# Altium PCB Panelized_S3220B.PcbDoc
Units mm, origin at the board's own origin, x right, y up, seen from the top; angles counter-clockwise.
Board outline 319 x 339 mm, 4 copper layers (Top Layer, Internal 1, Internal 2, Bottom Layer), stack 1.411 mm thick; 3 components, 135 nets, 10 pads, 0 vias.
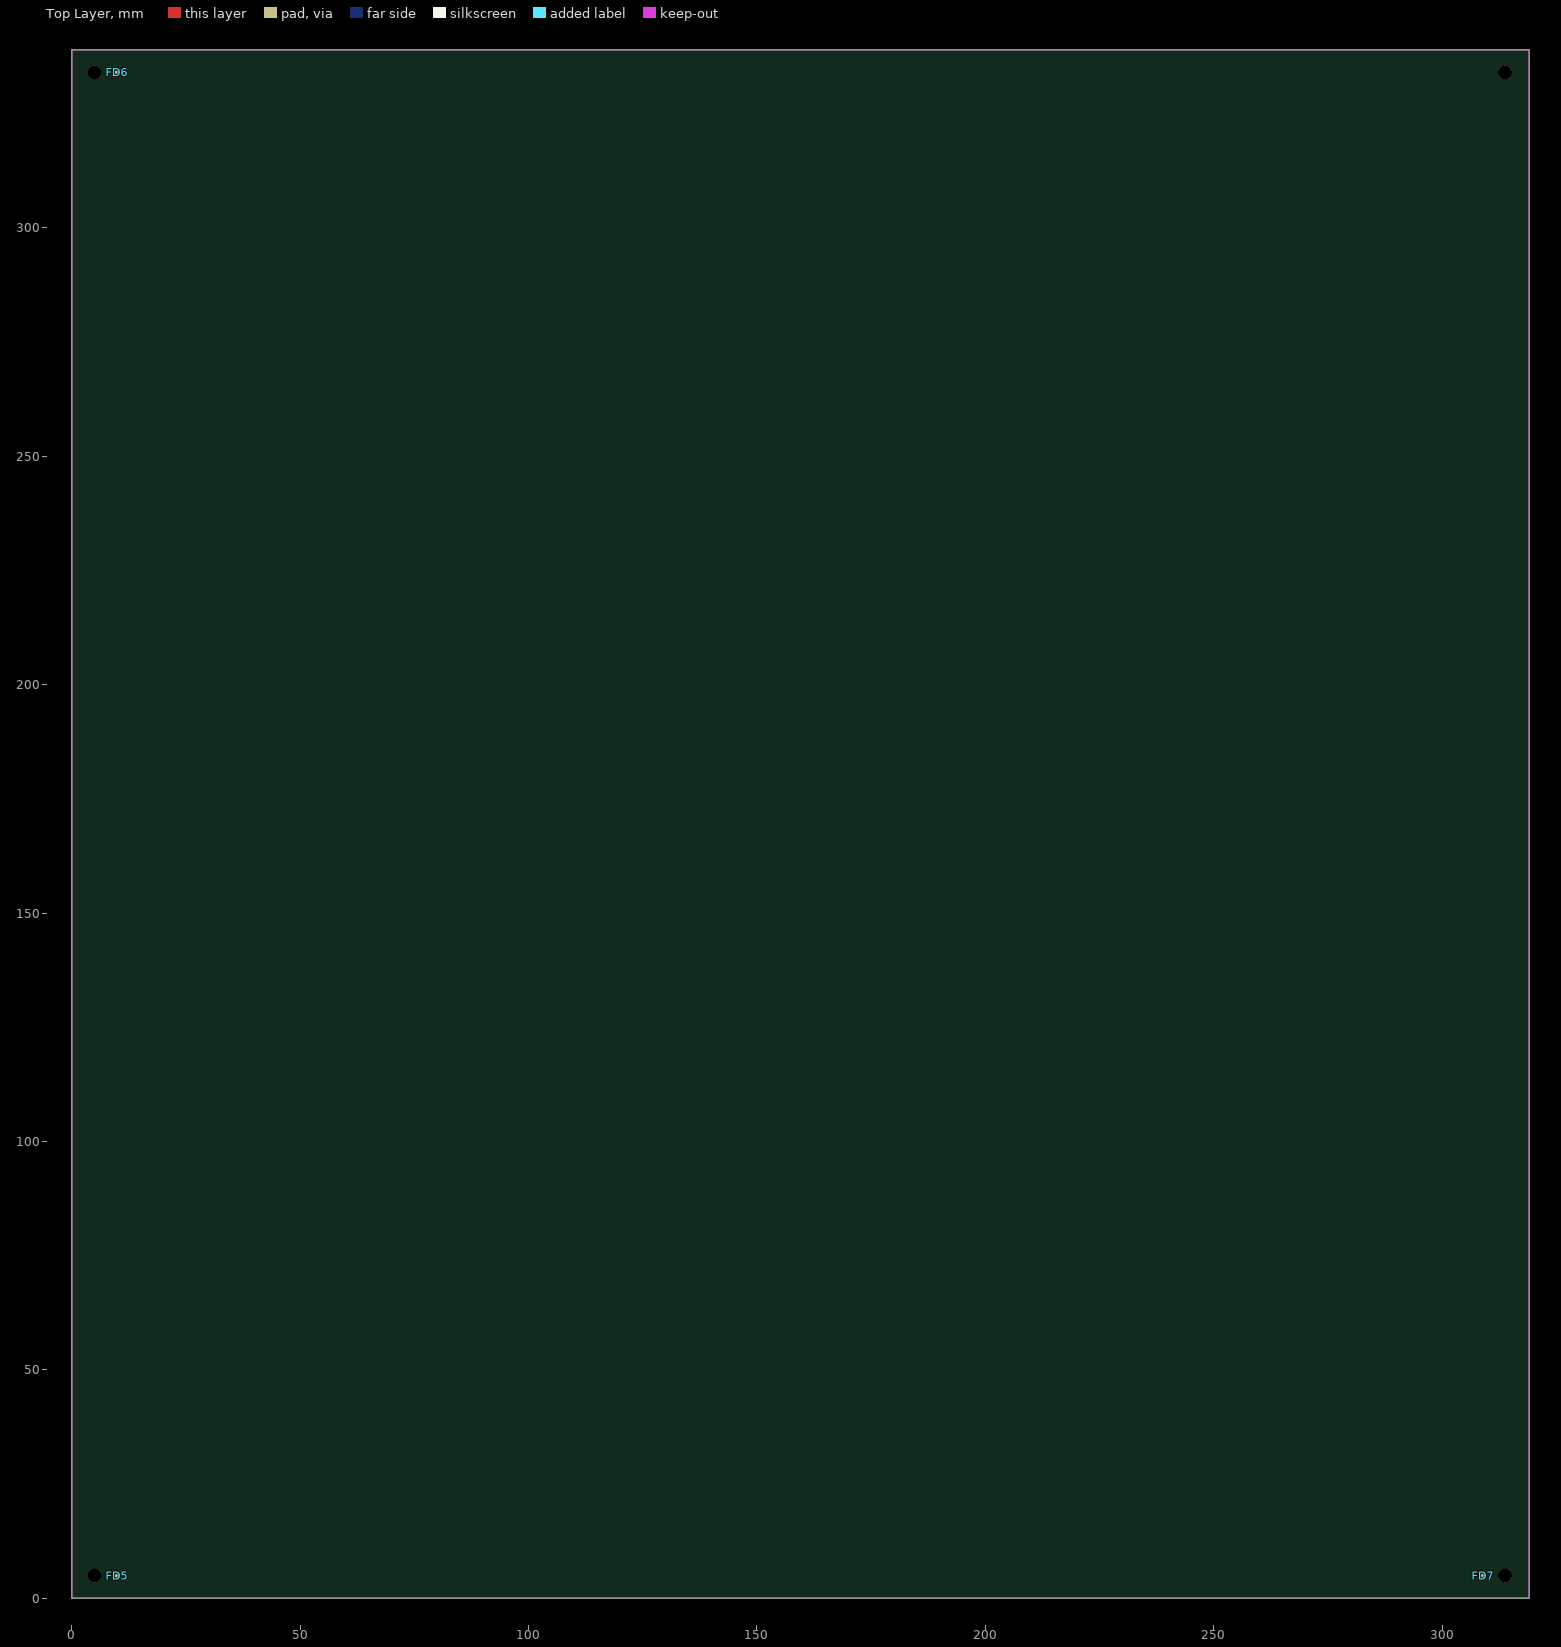
[diagram p0: Top Layer view]
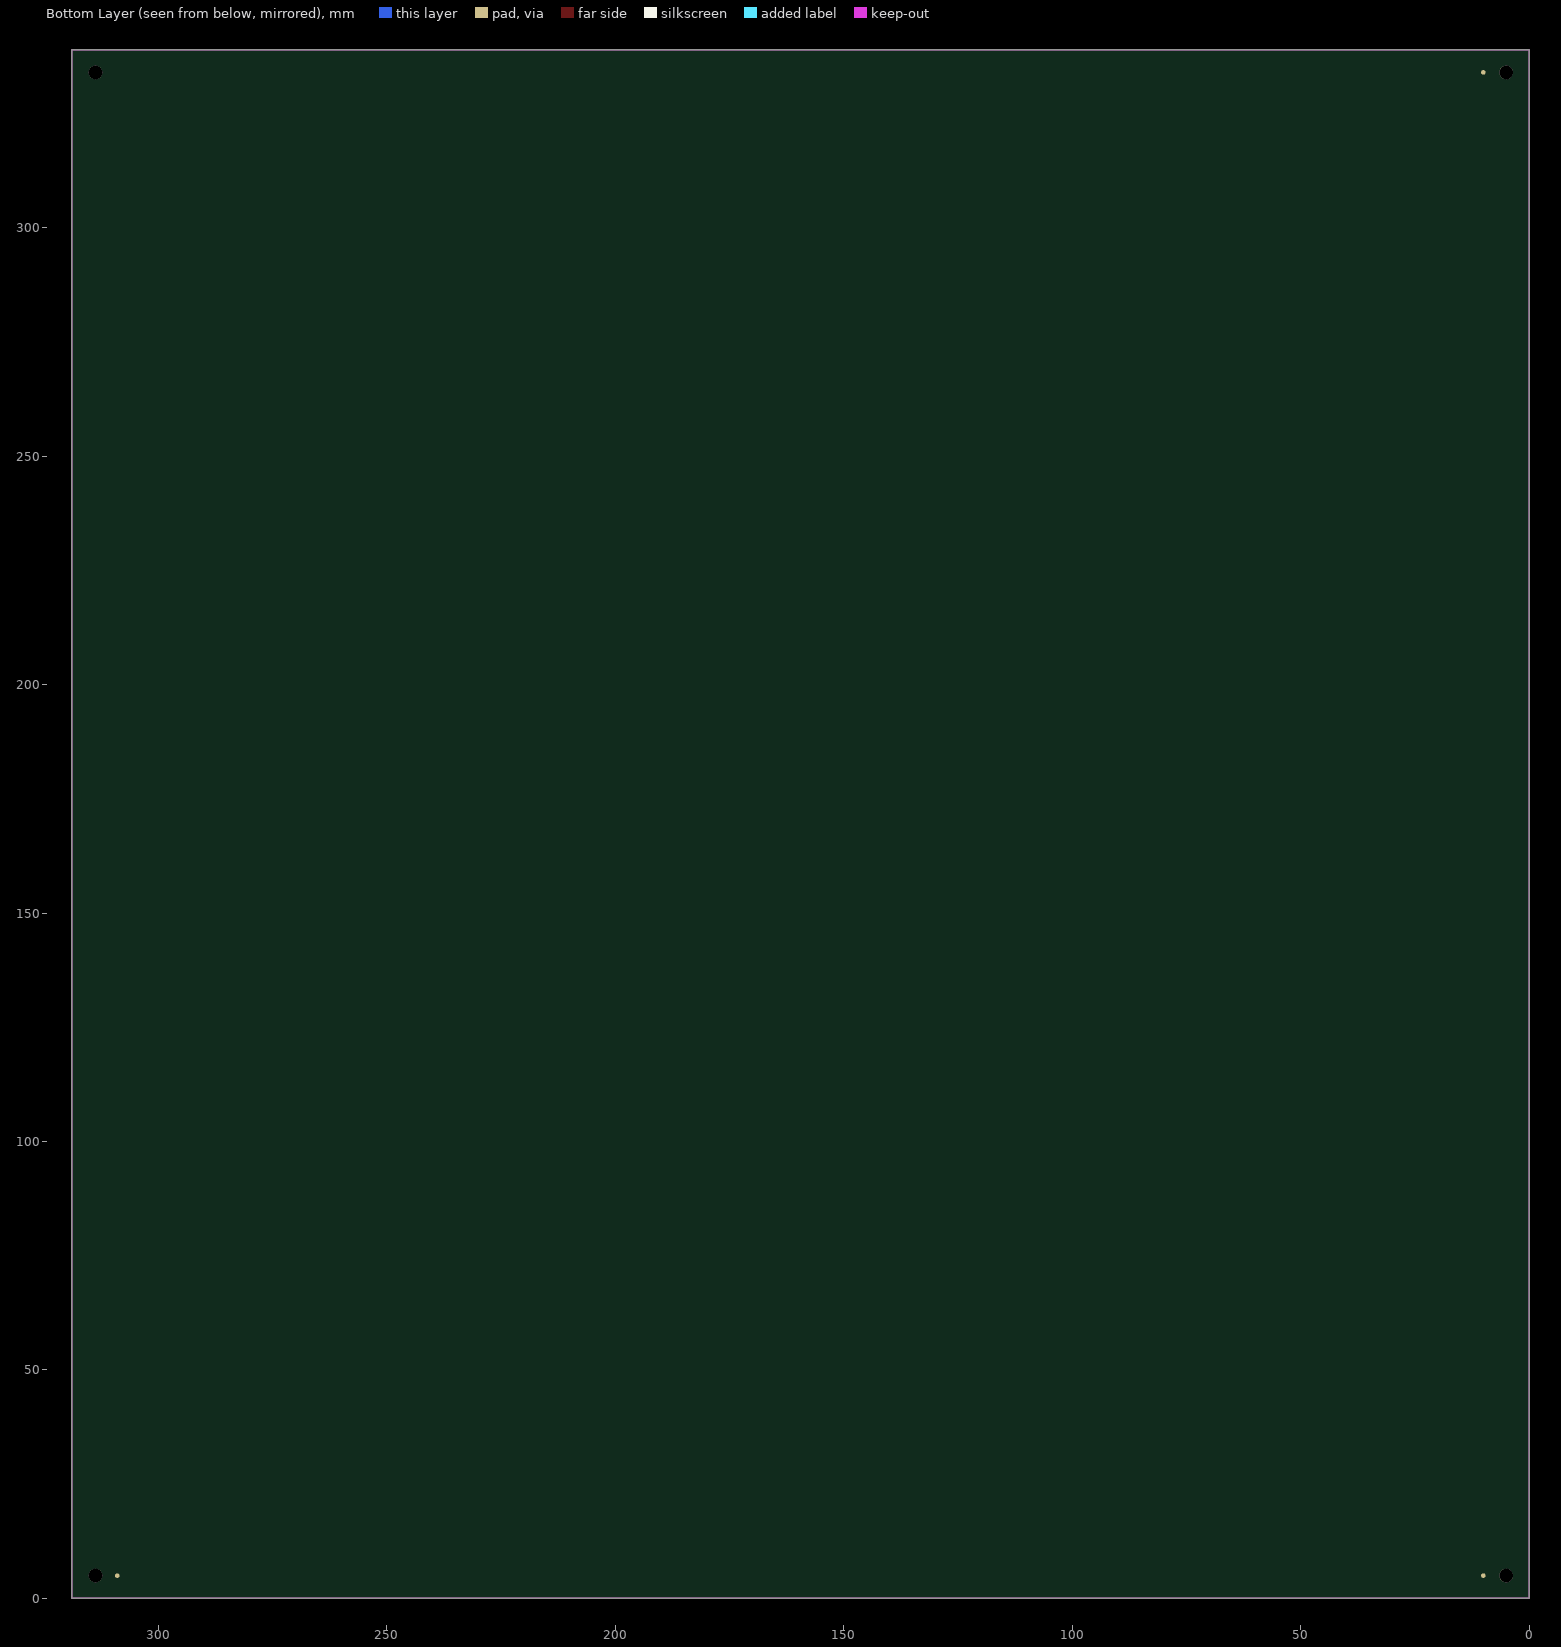
[diagram p1: Bottom Layer view, seen from below]

## Layer stack, top to bottom
Top Solder: solder mask 0.0102, Solder Resist, Dk 3.5
Top Layer: signal copper 0.035
Dielectric 1: core 0.12, FR-4, Dk 4.2
Internal 1: signal copper 0.035
Dielectric 3: prepreg 1.03, Dk 4.2
Internal 2: signal copper 0.035
Dielectric 2: core 0.12, Dk 4.2
Bottom Layer: signal copper 0.0356
Bottom Solder: solder mask 0.0102, Solder Resist, Dk 3.5

## Board outline
0,0 0,339 319,339 319,0

## Design rules (kind name [scope] priority, off if disabled: settings)
AssemblyTestPointUsage [All] p1 off:
AssemblyTestpoint [All] p1 off: testpointundercomponent=TRUE minsize=1.016 maxsize=2.54 preferedsize=1.524 minholesize=0 maxholesize=1.016 preferedholesize=0.813 testpointgrid=0.025 usegrid=TRUE gridtolerance=0 allowsidetop=TRUE allowsidebottom=TRUE
Clearance Clearance_TMP103 [HasFootprint('BGA4C40P2X2_76X76X62')] p1: gap=0.102 ignorepadtopadclearanceinfootprint=FALSE except(0: Arc-Hole Track-Hole SMDPad-Hole THPad-Hole Via-Hole Fill-Hole Poly-Hole Region-Hole Text-Hole)
Clearance Clearance_Poly [InPoly] p2: gap=0.25 ignorepadtopadclearanceinfootprint=FALSE except(0: Arc-Hole Track-Hole SMDPad-Hole THPad-Hole Via-Hole Fill-Hole Poly-Hole Region-Hole Text-Hole)
Clearance [All] p3: gap=0.15 ignorepadtopadclearanceinfootprint=FALSE except(0: Arc-Hole Track-Hole SMDPad-Hole THPad-Hole Via-Hole Fill-Hole Poly-Hole Region-Hole Text-Hole)
Clearance Clearance_Keepout [isKeepout] p4: gap=0.3 ignorepadtopadclearanceinfootprint=FALSE except(0: Arc-Hole Track-Hole SMDPad-Hole THPad-Hole Via-Hole Fill-Hole Poly-Hole Region-Hole Text-Hole)
ComponentClearance ComponentClearance_Fiducial [hasfootprint('fiducial_rect') or hasfootprint('fiducial_round')] p1 off: gap=0 collisioncheckmode=3 verticalgap=0 showdistances=FALSE
ComponentClearance [All] p2 off: gap=0.254 collisioncheckmode=3 verticalgap=0.254 showdistances=FALSE
DiffPairsRouting [All] p1: maxlimit=0.25 minlimit=0.25 mostfreqgap=0.25 toplayer_minwidth=0.2 toplayer_maxwidth=0.3 toplayer_prefwidth=0.2 midlayer1_minwidth=0.2 midlayer1_maxwidth=0.3 midlayer1_prefwidth=0.2 midlayer2_minwidth=0.2 midlayer2_maxwidth=0.3 midlayer2_prefwidth=0.2 bottomlayer_minwidth=0.2 bottomlayer_maxwidth=0.3 bottomlayer_prefwidth=0.2 maxuncoupledlength=12.7
FabricationTestPointUsage [All] p1 off: valid=0 allowmultiple=FALSE
FabricationTestpoint [All] p1 off: side=3 testpointundercomponent=TRUE minsize=1.016 maxsize=2.54 preferedsize=1.524 minholesize=0 maxholesize=1.016 preferedholesize=0.813 testpointgrid=0.025 allowsidetop=TRUE allowsidebottom=TRUE usegrid=TRUE gridtolerance=0
FanoutControl Fanout_BGA [IsBGA] p1: bgadir=Out bgaviamode=Centered fanoutstyle=BGA fanoutdirection=Alternating viagrid=0.025 // Fanout_BGA (Default Rule)
HoleSize [All] p1: absolutevalues=TRUE maxlimit=5.08 minlimit=0.203 maxpercent=80.000 minpercent=20.000
MatchedLengths "USB length matching" [InNetClass('All Nets')] p1: tolerance=2 checknetsindiffpair=TRUE checkdiffpairvsdiffpair=FALSE checkxsignals=FALSE checkothers=FALSE
MinimumSolderMaskSliver [All] p1: minsoldermaskwidth=0
PlaneClearance [All] p1: clearance=0.305
PlaneConnect PlaneConnect_Via [isvia] p1: planeconnectstyle=Direct reliefexpansion=0.508 reliefentries=4 reliefconductorwidth=0.254 reliefairgap=0.254
PlaneConnect [All] p2: planeconnectstyle=Relief reliefexpansion=0.254 reliefentries=4 reliefconductorwidth=0.508 reliefairgap=0.254
PolygonConnect PolygonConnect_SR [(ObjectKind = 'Component') And (Footprint = 'BGA81C80P3X3_290X230X110')] p1: connectstyle=Relief reliefconductorwidth=0.2 reliefentries=4 polygonreliefangle="90 Angle" airgapwidth=0.254
PolygonConnect PolygonConnect_TMP103 [HasFootprint('BGA4C40P2X2_76X76X62')] p2: connectstyle=Relief reliefconductorwidth=0.152 reliefentries=4 polygonreliefangle="90 Angle" airgapwidth=0.305
PolygonConnect PolygonConnect_Via [IsVia] p3: connectstyle=Direct reliefconductorwidth=0.254 reliefentries=4 polygonreliefangle="90 Angle" airgapwidth=0.254
PolygonConnect [All] p4: connectstyle=Relief reliefconductorwidth=0.2 reliefentries=4 polygonreliefangle="90 Angle" airgapwidth=0.305
RoutingLayers [All] p1: top layer_v5=TRUE mid layer 1_v5=FALSE mid layer 2_v5=FALSE bottom layer_v5=TRUE
RoutingVias [All] p1: holewidth=0.35 width=0.5 viastyle="Through Hole" minholewidth=0.25 minwidth=0.5 maxholewidth=0.5 maxwidth=1
SMDNeckDown [All] p1 off: percent=50.000
ShortCircuit ShortCircuit_Logo [hasfootprint('GT Logo Inv') or istextinverted] p1: allowed=TRUE
ShortCircuit [All] p2: allowed=FALSE
SilkToSilkClearance [All] p1 off: silktosilkclearance=0.254
SilkToSolderMaskClearance SilkscreenOverComponentPads [IsPad] p1 off: minsilkscreentomaskgap=0.254 clearancetoexposedcopper=TRUE
SolderMaskExpansion [All] p1 off: expansion=0.102 istentingtop=FALSE
Width Width_CASE [InNet('CASE')] p1: maxlimit=2.54 minlimit=0.203 preferedwidth=0.508
Width [All] p2: maxlimit=2.5 minlimit=0.15 preferedwidth=0.2
15 further rules are at their usual default settings.

## Classes and differential pairs
differential pair USB_Data: +USB_Data_P -USB_Data_N

## Components (designator, comment, footprint, x,y, rotation, side; value= is the part's Value field where it differs from the comment)
FD5 "Fiducial" FD_Fiducial 10,5 r90 top (schematic designator FD3)
FD6 "Fiducial" FD_Fiducial 10,334 r90 top (schematic designator FD3)
FD7 "Fiducial" FD_Fiducial 309,5 r90 top (schematic designator FD3)

## Footprints (in the part's own frame and the unit in brackets; to place one, negate y for a bottom-side part, rotate by r counter-clockwise, add the part's x,y. Pads: shape width x height; smd on the part's side, far side on the other; paste and mask are expansions set on the pad)
FD_Fiducial [mm] "Fiducial - reference point"
  round 1 smd paste-10 mask+0.5: 0(0,0)
  round 1 smd far side paste-10 mask+0.5: 0(0,0)
  Top Layer pour cut-out: 0,-1 -0.383,-0.924 -0.707,-0.707 -0.924,-0.383 -1,0 -1,0 -0.924,0.383 -0.707,0.707 -0.383,0.924 0,1 0,1 0.383,0.924 0.707,0.707 0.924,0.383 1,0 1,0 0.924,-0.383 0.707,-0.707 0.383,-0.924 0,-1
  Bottom Layer pour cut-out: 0,-1 -0.383,-0.924 -0.707,-0.707 -0.924,-0.383 -1,0 -1,0 -0.924,0.383 -0.707,0.707 -0.383,0.924 0,1 0,1 0.383,0.924 0.707,0.707 0.924,0.383 1,0 1,0 0.924,-0.383 0.707,-0.707 0.383,-0.924 0,-1

## Part data
FD5 FD6 FD7: "Reference point for assembly machine", Manufacturer="Swiss Innovation Lab", Currency=$, Manufacturer Part Number=Fiducial, Price=0, Supplier 1="Swiss Innovation Lab", Supplier Part Number 1=Fiducial

## Free pads (board coordinates)
  round 3 hole 3 unplated: ""(5,5) ""(5,334) ""(313.75,334) ""(313.75,5)

## Nets (pads, with @x,y where several pads share a name; then routed paths per layer and width w, separated by ;. In a path a pad name is that pad's centre, name@x,y a point inside that pad or via, vN(x,y) a via of type N, cw(c..) or ccw(c..) an arc to the next point about the centre after c; other vN are vias at no path point)
+3V: 
+3V_ext: 
+4V7: 
+5V: 
+VBat: 
ACC_INT: 
eLED_on_off: 
eLED_on_off_ext: 
ePaper_On_Off: 
ePaper_PSU: 
ePaper_RST: 
ePaper_VDD: 
ePaper_Wake_up: 
GND: 
GND_ext: 
GPS_On_Off: 
I2C_EXP_INT: 
LED_1: 
LED_1_switched: 
LED_2: 
LED_2_switched: 
LED_3: 
LED_3_switched: 
LED_4: 
LED_4_switched: 
LED_ACOK: 
LED_ACOK_ext: 
LED_CHGOK: 
LED_CHGOK_ext: 
Lora_On_Off: 
LORA_RESET: 
LoRa_VDD: 
Mic_ext: 
Mic_On_Off: 
Mic_On_Off_ext: 
Microphone: 
NetC5_1: 
NetC6_1: 
NetC6_2: 
NetC8_2: 
NetC11_1: 
NetC11_2: 
NetC12_2: 
NetC15_1: 
NetC17_2: 
NetC24_2: 
NetC28_2: 
NetC32_1: 
NetC33_1: 
NetC39_1: 
NetC40_1: 
NetC41_2: 
NetC42_2: 
NetC43_2: 
NetC44_1: 
NetC44_2: 
NetC45_2: 
NetD9_2: 
NetF2_1: 
NetJ10_1: 
NetJ10_2: 
NetJ10_3: 
NetJ14_1: 
NetL3_2: 
NetP7_S: 
NetQ2_3: 
NetQ3_3: 
NetQ5_3: 
NetQ6_3: 
NetQ10_3: 
NetR1_2: 
NetR2_2: 
NetR3_2: 
NetR6_2: 
NetR8_1: 
NetR9_1: 
NetR10_1: 
NetR10_2: 
NetR14_2: 
NetR15_1: 
NetR16_1: 
NetR18_1: 
NetR19_1: 
NetR19_2: 
NetR21_2: 
NetR38_2: 
NetR49_1: 
NetR49_2: 
NetU5_1: 
NetU7_13: 
NetU8_16: 
NetU19_1: 
NetU19_2: 
NetU19_3: 
NTC: 
PB_1: 
PB_1_ext: 
PB_2: 
PB_2_ext: 
PB_3: 
PB_3_ext: 
PB_4: 
PB_4_ext: 
RESET#: 
RX_ePaper: 
S\D\: 
SCL: 
SCL_ext: 
SDA: 
SDA_ext: 
SWDCLK: 
SWDIO: 
SWO: 
TX_ePaper: 
UART_CTS: 
UART_RTS: 
UART_RX_ePaper: 
UART_RX_GPS: 
UART_RX_Lora: 
UART_RX_USB: 
UART_RX_WiFi: 
UART_TX_ePaper: 
UART_TX_GPS: 
UART_TX_Lora: 
UART_TX_USB: 
UART_TX_WiFi: 
USB_Data_N: 
USB_Data_P: 
VBat: 
Vcc: 
Vcc_ext: 
Vext: 
VSys: 
Vusb: 
WiFi_ON_OFF: 
pads on no net: FD5.0 FD6.0 FD7.0

## Keep-outs
Keep-Out Layer:
  the board outline again, w0.3

## Silkscreen, mask and mechanical layers (free items; w line width, h text height)
Fabrication notes:
  drawing of 702 lines, arcs and shapes, not listed
  text "DESIGN INFORMATION" at 364.852,297.793 h2
  text "BOARD NAME:" at 402.444,297.793 h2
  text "Panelized S3220B" at 415.25,297.75 h2
  text "BOARD TECHNOLOGY" at 364.852,295.253 h2
  text "0.2mm" at 366.973,293.064 h2
  text "PANEL SIZE:" at 417.25,293 h2
  text "319.00 mm" at 431.75,293 h2
  text "339.00 mm" at 454.75,293 h2
  text "0.2mm" at 380.651,292.891 h2
  text "0.2mm" at 394.621,292.764 h2
  text "X" at 447.531,292.205 h2
  text "(MIN. TRACK   /      PADS          /    CLEARANCE)" at 364.75,290 h2
  text "SINGLE BOARD SIZE:" at 409.75,289 h2
  text "147.00 mm" at 431.75,289 h2
  text "62.50 mm" at 454.75,289 h2
  text "X" at 447.531,288.455 h2
  text "MINIMUM HOLE SIZE: 0.35mm" at 365,286.75 h2
  text "CIRCUIT TYPE:" at 364.852,282.731 h2
  text "SS" at 387.712,282.731 h2
  text "DS" at 405.492,282.731 h2
  text "X" at 420.097,282.731 h2
  text "PTH" at 423.272,282.731 h2
  text "ML" at 434.194,282.731 h2
  text "X" at 438.004,282.731 h2
  text "No. of Layers" at 441.052,282.731 h2
  text "4" at 458.413,282.574 h2
  text "FINGER CONNECTOR DIM PER:" at 364.852,279.683 h2
  text "AS SHOWN" at 441.052,279.683 h2
  text "No. OFF TOTAL" at 381.616,276.889 h2
  text "ONE SIDE" at 423.272,276.889 h2
  text "BOTH SIDES" at 441.052,276.635 h2
  text "X" at 402.414,274.068 h2
  text "VIAS:" at 364.852,273.968 h2
  text "NONE" at 376.282,273.968 h2
  text "X" at 384.664,273.968 h2
  text "FEED THRU'" at 387.712,273.968 h2
  text "TENTED" at 405.492,273.968 h2
  text "BURIED LAYER SEQUENCE" at 423.272,273.968 h2
  text "UNIQUE DRILL" at 387.712,270.92 h2
  text "2 SIZE" at 405.492,270.92 h2
  text "BLIND LAYER SEQUENCE" at 423.272,270.92 h2
  text "Layer Stack Manager (PCB)" at 400.285,268.634 h2
  text "X" at 438.004,268.634 h2
  text "AS SHOWN" at 441.052,268.634 h2
  text "LAYER CONSTRUCTION PER:" at 364.852,268.507 h2
  text "Altium Designer 21" at 440.891,265.847 h2
  text "ARTWORK:" at 364.852,265.713 h2
  text "MANUAL" at 387.712,265.713 h2
  text "DIGITISED" at 405.492,265.713 h2
  text "X" at 420.224,265.713 h2
  text "CAD" at 423.272,265.713 h2
  text "TYPE" at 434.194,265.713 h2
  text "ARTWORK/PATTERN MASTER LIST" at 364.852,261.014 h2
  text "DESCRIPTION" at 366.122,258.601 h2
  text "DRAWING No./CAD FILE REF." at 384.791,258.601 h2
  text "LAYER NAME" at 426.066,258.601 h2
  text "GERBER FILE REF" at 446.818,258.525 h2
  text "Top Paste Mask" at 424.009,253.521 h2
  text "GTP" at 416.932,253.471 h2
  text "GTP" at 466.812,253.445 h2
  text "GERBER FILE" at 364.507,253.394 h2
  text "GTO" at 416.932,250.971 h2
  text "GTO" at 466.812,250.956 h2
  text "Top Overlay" at 424.009,250.93 h2
  text "GERBER FILE" at 364.507,250.854 h2
  text "GTS" at 416.932,248.471 h2
  text "Top Solder Mask" at 424.009,248.492 h2
  text "GTS" at 466.812,248.365 h2
  text "GERBER FILE" at 364.507,248.314 h2
  text "TOP LAYER" at 424.009,245.901 h2
  text "GTL" at 466.812,245.825 h2
  text "GERBER FILE" at 364.507,245.774 h2
  text "GTL" at 416.932,245.771 h2
  text "G1" at 466.812,243.442 h2
  text "Signal Layer 1" at 424.009,243.342 h2
  text "G1" at 416.932,243.251 h2
  text "GERBER FILE" at 364.507,243.234 h2
  text "Signal Layer 2" at 424.01,240.842 h2
  text "G2" at 466.812,240.842 h2
  text "G2" at 416.932,240.751 h2
  text "GERBER FILE" at 364.507,240.694 h2
  text "BOTTOM LAYER" at 424.009,238.281 h2
  text "GBL" at 416.932,238.207 h2
  text "GBL" at 466.812,238.205 h2
  text "GERBER FILE" at 364.507,238.154 h2
  text "GBS" at 416.932,235.807 h2
  text "Bottom Solder Mask" at 424.009,235.792 h2
  text "GBS" at 466.812,235.665 h2
  text "GERBER FILE" at 364.507,235.614 h2
  text "GBO" at 416.932,233.207 h2
  text "Bottom Overlay" at 424.009,233.201 h2
  text "GBO" at 466.812,233.125 h2
  text "GERBER FILE" at 364.507,233.074 h2
  text "GBP" at 466.812,230.712 h2
  text "Bottom Paste Mask" at 424.009,230.661 h2
  text "GBP" at 416.932,230.611 h2
  text "GERBER FILE" at 364.507,230.534 h2
  text "GM3" at 466.812,225.612 h2
  text "V-groove scoring" at 424.009,225.561 h2
  text "GM3" at 416.932,225.511 h2
  text "GERBER FILE" at 364.507,225.434 h2
  text "GM4" at 466.812,223.112 h2
  text "Route Cutter Tool Layer" at 424.009,223.061 h2
  text "GM4" at 416.932,223.011 h2
  text "GERBER FILE" at 364.507,222.934 h2
  text "APERTURE LIST" at 364.507,210.347 h2
  text "APR" at 416.932,210.271 h2
  text "DRILL REPORT" at 364.507,207.807 h2
  text "DRR" at 416.932,207.731 h2
  text "DRILL FILE" at 364.507,205.2 h2
  text "DRL" at 416.932,205.056 h2
  text "TXT" at 416.932,202.65 h2
  text "EXCELLON DRILL" at 364.507,202.575 h2
  text "MATERIAL:" at 364.852,197.37 h2
  text "GLASS FIBRE EPOXY RESIN NEMA GRADE FR4-08 (IPC-4101) - WITH TG170" at 390.506,197.116 h2
  text "X" at 387.839,196.989 h2
  text "THICKNESS:" at 372.726,194.195 h2
  text "0.8mm" at 390.506,194.195 h2
  text "1.2mm" at 408.159,194.195 h2
  text "1.6mm" at 425.812,194.195 h2
  text "2.4mm" at 443.592,194.195 h2
  text "3.2mm" at 461.372,194.195 h2
  text "X" at 423.399,194.068 h2
  text "TOLERANCE:" at 372.599,191.147 h2
  text "OTHER +/-" at 443.592,191.147 h2
  text "IN A/W IPC-D-300G CLASS" at 391.052,190.947 h2
  text "BOW & TWIST:" at 372.586,188.099 h2
  text "AS SHOWN" at 443.719,187.972 h2
  text "IN A/W IPC-D-300G CLASS" at 391.052,187.899 h2
  text "COPPER THICKNESS (FINISHED)" at 370.15,185.1 h2
  text "18um" at 390.506,182.511 h2
  text "35um" at 417.557,182.511 h2
  text "70um" at 443.846,182.511 h2
  text "OUTER:" at 373.75,182.4 h2
  text "X" at 414.814,182.308 h2
  text "18um" at 390.506,179.463 h2
  text "35um" at 417.557,179.463 h2
  text "70um" at 443.846,179.463 h2
  text "INNER SIGNAL:" at 373.75,179.4 h2
  text "X" at 414.763,179.26 h2
  text "18um" at 390.506,176.415 h2
  text "35um" at 417.557,176.415 h2
  text "70um" at 443.846,176.415 h2
  text "INNER PWR:" at 373.75,176.4 h2
  text "X" at 414.89,176.288 h2
  text "STRUCTURE:" at 364.852,173.367 h2
  text "REFER" at 390.506,173.367 h2
  text "AS PER DRAWING No." at 390.379,170.192 h2
  text "AS SHOWN" at 443.719,170.192 h2
  text "X" at 441.179,170.065 h2
  text "DRILLING:" at 364.852,167.398 h2
  text "COMPONENT SIDE" at 390.506,165.112 h2
  text "SOLDER SIDE" at 417.303,165.112 h2
  text "VIEWED FROM:" at 371.85,164.9 h2
  text "X" at 387.839,164.858 h2
  text "REFERENCE:" at 372.091,162.064 h2
  text "AS SHOWN" at 390.379,161.937 h2
  text "PATTERN MASTER LIST" at 417.43,161.937 h2
  text "X" at 441.179,161.937 h2
  text "NC_DRILL FILES" at 443.719,161.937 h2
  text "X" at 387.839,161.81 h2
  text "20um" at 417.557,159.016 h2
  text "PTH MINIMUM COPPER THICKNESS:" at 372.15,158.9 h2
  text "X" at 414.89,158.889 h2
  text "OTHER" at 443.719,158.889 h2
  text "NPTH:" at 372.05,156 h2
  text "TENTED" at 390.379,155.841 h2
  text "X" at 414.89,155.841 h2
  text "PADS REMOVED" at 417.43,155.841 h2
  text "REMOVE PADS" at 443.719,155.841 h2
  text "X" at 387.839,155.714 h2
  text "2nd DRILL" at 390.379,152.793 h2
  text "BOTH" at 417.43,152.793 h2
  text "AS SHOWN" at 429.749,152.793 h2
  text "NONE" at 443.719,152.793 h2
  text "BOARD FINISH:" at 364.852,149.872 h2
  text "X" at 387.839,149.745 h2
  text "ETCHING" at 390.379,149.745 h2
  text "REFER PATTERN MASTER LIST" at 417.43,149.745 h2
  text "LEGEND / SCREEN PRINT:" at 371.25,146.8 h2
  text "NONE" at 398.852,146.808 h2
  text "COMPONENT" at 417.427,146.773 h2
  text "SOLDER" at 443.752,146.708 h2
  text "X" at 414.887,146.646 h2
  text "X" at 441.137,146.646 h2
  text "WHITE" at 390.452,143.908 h2
  text "COLOUR:" at 377.15,143.8 h2
  text "X" at 387.912,143.781 h2
  text "YELLOW" at 417.43,143.649 h2
  text "OTHER" at 443.719,143.649 h2
  text "SOLDER RESIST:" at 371.05,140.6 h2
  text "LIQUID PHOTOIMAGEABLE" at 390.379,140.601 h2
  text "SCREEN PRINT" at 429.749,140.601 h2
  text "FINISH:" at 377.45,137.6 h2
  text "MATTE" at 390.379,137.553 h2
  text "GLOSS" at 403.079,137.553 h2
  text "COLOUR:" at 377.15,134.6 h2
  text "RED" at 390.379,134.505 h2
  text "X" at 400.5,134.5 h2
  text "GREEN" at 403.079,134.505 h2
  text "YELLOW" at 417.43,134.505 h2
  text "BLUE" at 429.749,134.505 h2
  text "OTHER" at 443.719,134.505 h2
  text "TRACK FINISH:" at 364.852,131.584 h2
  text "SELECTIVE SOLDER (HASL)" at 390.379,131.457 h2
  text "REFLOW SOLDER" at 429.749,131.457 h2
  text "0.1um - 0.2um ELECTROLESS GOLD OVER 3um NICKEL" at 390.45,128.6 h2
  text "X" at 387.85,128.5 h2
  text "IMMERSION GOLD" at 390.379,125.361 h2
  text "OTHER" at 429.749,125.361 h2
  text "EDGE BOARD" at 364.852,122.44 h2
  text "1.3um HARD GOLD OVER 5um     NICKEL / TIN-NICKEL" at 390.379,122.313 h2
  text "CONTACTS:" at 364.852,120.281 h2
  text "HARD FINISH GOLDE PLATE" at 390.379,119.265 h2
  text "OTHER" at 429.749,119.265 h2
  text "AS SHOWN" at 390.379,116.217 h2
  text "REFER" at 429.749,116.217 h2
  text "PROFILING:" at 364.852,113.169 h2
  text "AS DIMENSIONED, MEASURED AND CUT FROM SPECIFIED DATUM." at 390.379,113.169 h2
  text "X" at 387.839,113.042 h2
  text "REFER PCB BLANK DWG No." at 390.506,110.248 h2
  text "USE PROFILE / ROUTE TAPE SUPPLIED (REFER PATTERN MASTER LIST)" at 390.506,107.2 h2
  text "SQUARE CUT" at 390.506,104.152 h2
  text "N.C. ROUTE" at 408.286,104.152 h2
  text "V. SCORE" at 426.066,104.152 h2
  text "BLANK" at 443.846,104.152 h2
  text "X" at 423.25,104 h2
  text "ACCEPTABILITY:" at 364.852,101.485 h2
  text "MATERIALS AND WORKMANSHIP FOR ALL PRINTED WIRING BOARDS TO MEET" at 387.077,101.358 h2
  text "OR EXCEED THE REQUIREMENTS OF:" at 387.077,98.564 h2
  text "IPC-6011/12 AND IPC-A-600E" at 390.633,95.897 h2
  text "1" at 426.193,95.897 h2
  text "2" at 435.083,95.897 h2
  text "3" at 443.979,95.835 h2
  text "UL CERTIFICATION" at 390.633,92.849 h2
  text "AUSTEL" at 426.193,92.849 h2
  text "ML-P-55110F GRP" at 390.125,89.801 h2
  text "A" at 409.913,89.801 h2
  text "B" at 418.053,89.801 h2
  text "AS2546" at 426.193,89.801 h2
  text "OTHER" at 443.973,89.801 h2
  text "ADDITIONAL REQUIREMENTS:" at 364.65,86.5 h2
  text "X" at 387.9,83.907 h2
  text "NONE" at 390.599,83.922 h2
  text "SAMPLE PLAN" at 408.379,83.922 h2
  text "MIL-P-55110E SERIAL Nos. PER ORDER" at 428.159,83.922 h2
  text "MICROSECTION:" at 369.85,83.8 h2
  text "NONE" at 390.694,80.734 h2
  text "CERTIFICATION:" at 369.75,80.6 h2
  text "A" at 428.113,80.501 h2
  text "MIL-P-55110E GRP" at 408.269,80.451 h2
  text "B" at 433.479,80.422 h2
  text "1" at 458.179,80.322 h2
  text "2" at 463.545,80.243 h2
  text "3" at 469.045,80.243 h2
  text "IPC CLASS:" at 443.769,80.151 h2
  text "RoHS Compliant" at 390.694,77.534 h2
  text "QUALITY RELEASE REPORT" at 408.269,77.251 h2
  text "OTHER" at 443.873,77.201 h2
  text "NONE" at 390.639,74.322 h2
  text "REQUIRED (100% PADS & NETS)" at 408.419,74.322 h2
  text "ELECTRICAL TEST:" at 369.75,74.2 h2
  text "PER ORDER" at 444.079,74.222 h2
  text "X" at 405.752,74.195 h2
  text "2 SIDES" at 427.795,71.135 h2
  text "MIN. PITCH" at 443.879,71.135 h2
  text "0.6mm" at 457.468,71.135 h2
  text "NONE" at 390.639,71.122 h2
  text "1 SIDE" at 408.292,71.122 h2
  text "SURFACE MOUNT:" at 369.65,71 h2
  text "X" at 425.5,71 h2
  text "FOIL" at 428.199,67.982 h2
  text "NONE" at 408.419,67.882 h2
  text "LEGEND" at 436.929,67.882 h2
  text "REFER" at 448.932,67.882 h2
  text "Bottom Overlay" at 457.056,67.896 h2
  text "X" at 446.238,67.843 h2
  text "MANUFACTURER'S ID/LOGO:" at 369.65,67.6 h2
  text "NONE" at 428.25,64.8 h2
  text "ISO9001/AS3901" at 408.439,64.622 h2
  text "MANUFACTURER'S ACCREDITATION:" at 369.65,64.5 h2
  text "PACKAGING AND HANDLING:" at 369.65,61.7 h2
  text "REFER" at 428.199,61.486 h2
  text "PER ORDER" at 408.419,61.386 h2
  text "Notes" at 363.05,53.95 h5
  text "1. All dimensions are in mm." at 364.72,48.12 h4
  text "2. The route cutter tool diameter is 2.0mm." at 364.72,43.87 h4
  text "3. The V-groove scoring tool angle is 30 degrees." at 364.72,39.37 h4
Mechanical 3:
  lines w0.2: -10,12 329,12 ; -10,75 329,75 ; -10,138 329,138 ; -10,201 329,201 ; -10,264 329,264 ; -10,327 329,327 ; 12,-10 12,349 ; 159.5,349 159.5,-10 ; 307,-10 307,349

## Panel: embedded boards
"S3220B.PcbDoc" at 12.25,12.25, 5 rows x 2 columns, spacing 63 x 147.5, rotation 0